# Altium PCB ToneControl 2.PcbDoc
Units mil, origin at the board's own origin, x right, y up, seen from the top; angles counter-clockwise.
Board outline 3700 x 2450 mil, 2 copper layers (Top Layer, Bottom Layer); 38 components, 33 nets, 92 pads, 0 vias.
Unrouted connection lines stored in the file: 59.
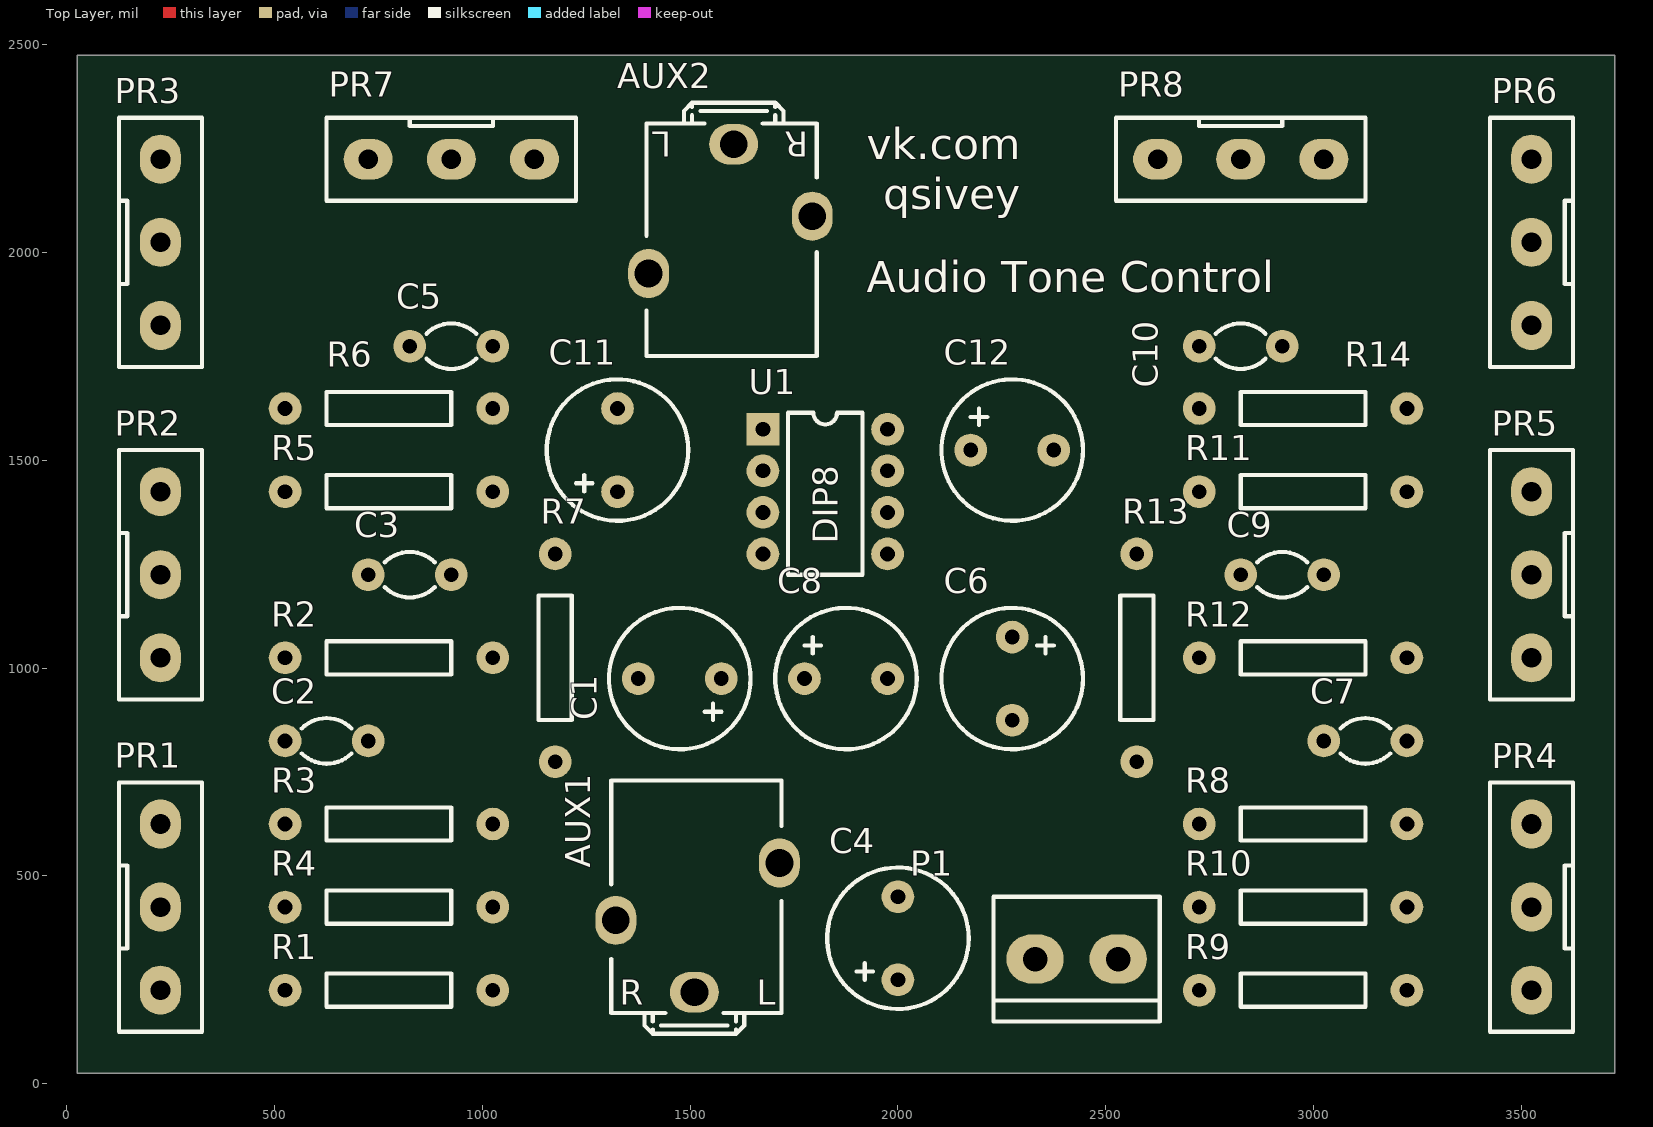
[diagram p0: Top Layer view]
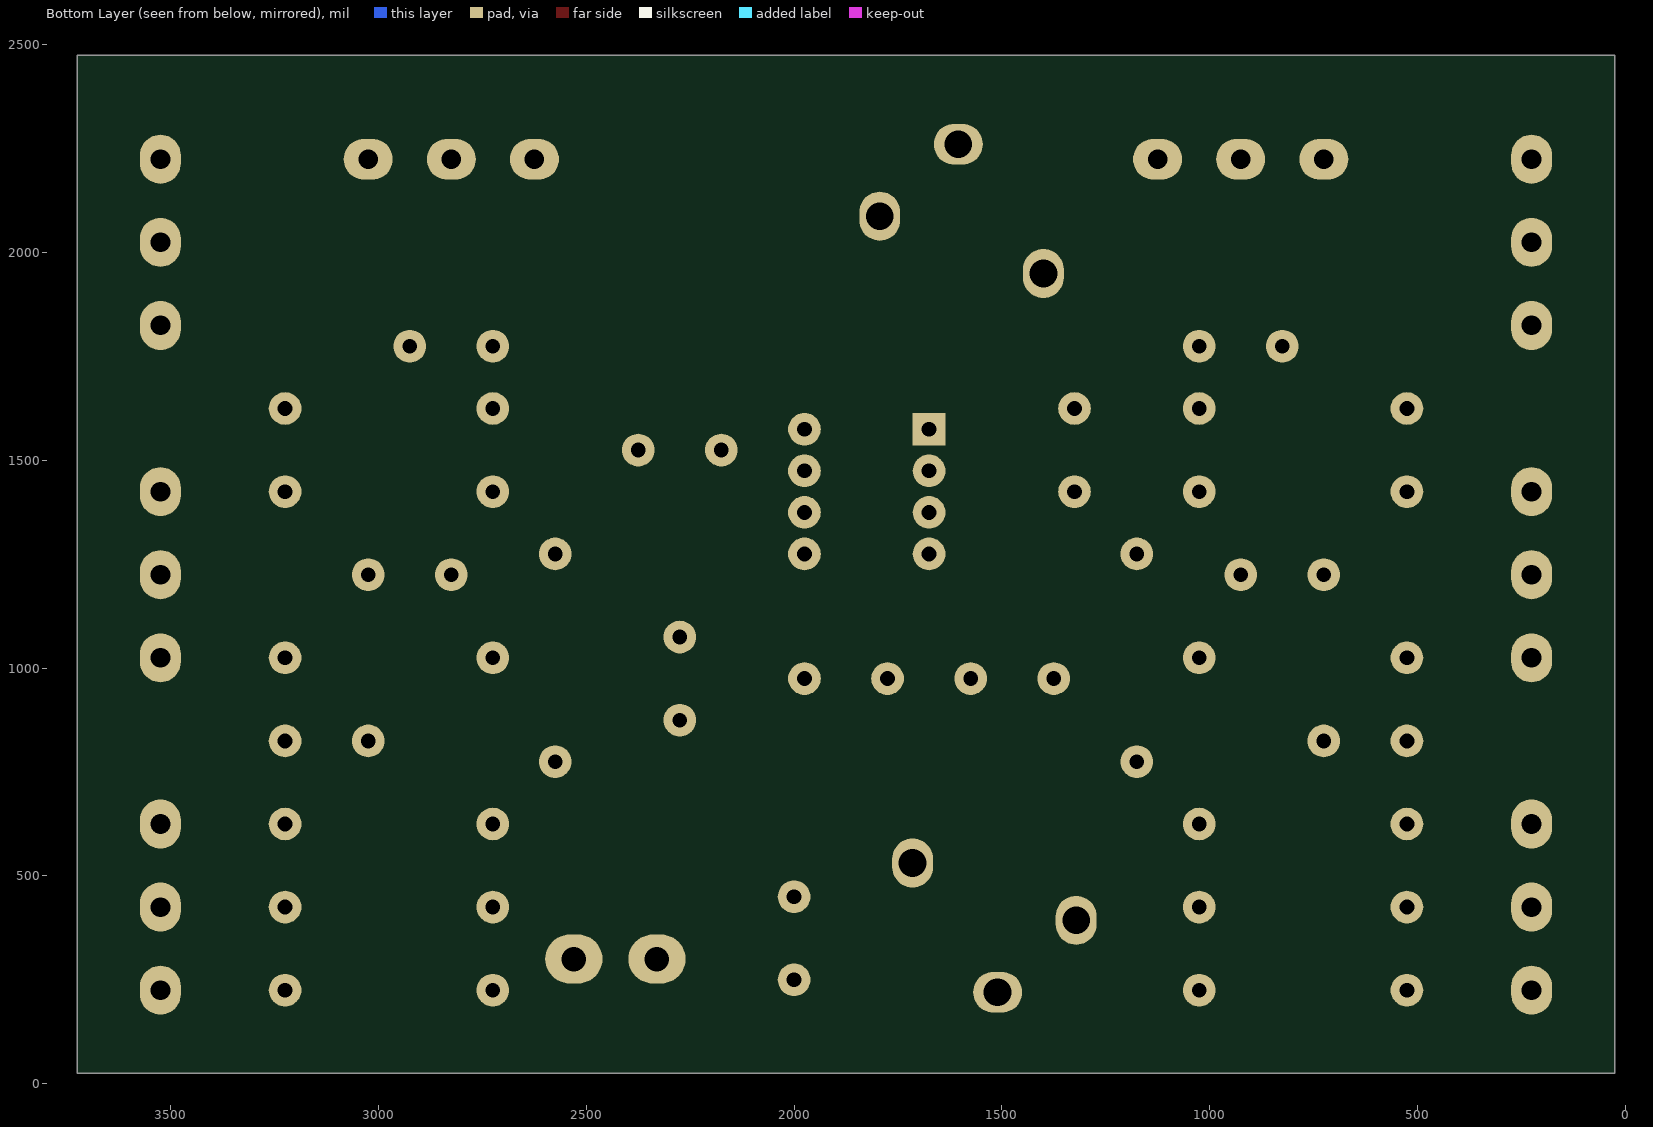
[diagram p1: Bottom Layer view, seen from below]

## Layer stack, top to bottom
Top Solder: solder mask 0.4, Solder Resist, Dk 3.5
Top Layer: signal copper 1.4
Dielectric 1: dielectric 12.6, FR-4, Dk 4.8
Bottom Layer: signal copper 1.4
Bottom Solder: solder mask 0.4, Solder Resist, Dk 3.5

## Board outline
25,25 25,2475 3725,2475 3725,25

## Design rules (kind name [scope] priority, off if disabled: settings)
BoardOutlineClearance [All] p1: gap=75 ignorepadtopadclearanceinfootprint=FALSE
Clearance [All] p1: gap=10 ignorepadtopadclearanceinfootprint=FALSE
PolygonConnect [All] p1: connectstyle=Relief reliefconductorwidth=10 reliefentries=4 polygonreliefangle="90 Angle" airgapwidth=10
RoutingVias [All] p1: holewidth=28 width=50 viastyle="Through Hole" minholewidth=28 minwidth=50 maxholewidth=28 maxwidth=50
SolderMaskExpansion [All] p1: expansion=4 istentingtop=FALSE
Width [All] p1: maxlimit=50 minlimit=20 preferedwidth=20
30 further rules are at their usual default settings.

## Components (designator, comment, footprint, x,y, rotation, side; value= is the part's Value field where it differs from the comment)
AUX1 "AUX" AUX_2 1510,220 r90 top
AUX2 "AUX" AUX_2 1604.72,2261.02 r270 top
C1 "10uF" CAP_POL_MED 1575,975 r180 top
C2 "47nF" CAP_CER_MED 725,825 r180 top
C3 "22nF" CAP_CER_MED 725,1225 r0 top
C4 "33uF" CAP_POL_MED 2000,250 r90 top
C5 "4.7nF" CAP_CER_MED 825,1775 r0 top
C6 "33uF" CAP_POL_MED 2275,1075 r270 top
C7 "47nF" CAP_CER_MED 3225,825 r180 top
C8 "10uF" CAP_POL_MED 1775,975 r0 top
C9 "22nF" CAP_CER_MED 3025,1225 r180 top
C10 "4.7nF" CAP_CER_MED 2925,1775 r180 top
C11 "10uF" CAP_POL_MED 1325,1425 r90 top
C12 "10uF" CAP_POL_MED 2175,1525 r0 top
P1 "Header_2" HEADER2 2330,300 r90 top
PR1 "100K" REOSTAT_CUS 225,625 r270 top
PR2 "100K" REOSTAT_CUS 225,1425 r270 top
PR3 "500K" REOSTAT_CUS 225,2225 r270 top
PR4 "100K" REOSTAT_CUS 3525,225 r90 top
PR5 "100K" REOSTAT_CUS 3525,1025 r90 top
PR6 "500K" REOSTAT_CUS 3525,1825 r90 top
PR7 "10K" REOSTAT_CUS 1125,2225 r180 top
PR8 "10K" REOSTAT_CUS 3025,2225 r180 top
R1 "12K" RES_MED 1025,225 r180 top
R2 "3.9K" RES_MED 1025,1025 r180 top
R3 "12K" RES_MED 525,625 r0 top
R4 "12K" RES_MED 525,425 r0 top
R5 "3.9K" RES_MED 525,1425 r0 top
R6 "1.8K" RES_MED 1025,1625 r180 top
R7 "1.8K" RES_MED 1175,1275 r270 top
R8 "12K" RES_MED 2725,625 r0 top
R9 "12K" RES_MED 3225,225 r180 top
R10 "12K" RES_MED 3225,425 r180 top
R11 "3.9K" RES_MED 2725,1425 r0 top
R12 "3.9K" RES_MED 3225,1025 r180 top
R13 "1.8K" RES_MED 2575,775 r90 top
R14 "1.8K" RES_MED 3225,1625 r180 top
U1 "TL-082" DIP8 1675,1575 r0 top

## Footprints (in the part's own frame and the unit in brackets; to place one, negate y for a bottom-side part, rotate by r counter-clockwise, add the part's x,y. Pads: shape width x height; smd on the part's side, far side on the other; paste and mask are expansions set on the pad)
AUX_2 [mm]
  oval 2.5x3 hole 1.7: 1(0,0)
  oval 3x2.5 hole 1.7: 2(4.4,4.8) 3(7.9,-5.2)
  silkscreen extent -2.54,-5.33 12.95,5.08, body extent -2.77,-5.59 13.21,5.33, height 4.57
CAP_CER_MED [mm]
  round 2 hole 0.9: 1(0,0) 2(5.08,0)
  silkscreen extent 1.02,-1.39 4.06,1.39, body extent -0.51,-0.51 5.59,0.51, height 7.37
CAP_POL_MED [mm]
  round 2 hole 0.9: 1(0,0) 2(5.08,0)
  silkscreen extent -1.79,-4.32 6.86,4.32, body extent -1.52,-4.06 6.67,4.06, height 13.61
DIP8 [mm]
  rect 2x2 hole 0.9: 1(0,0)
  round 2 hole 0.9: 2(0,-2.54) 3(0,-5.08) 4(0,-7.62) 5(7.62,-7.62) 6(7.62,-5.08) 7(7.62,-2.54) 8(7.62,0)
  silkscreen extent 1.52,-8.89 6.1,1.02, body extent -0.13,-8.89 7.75,1.27, height 3.05
HEADER2 [mm]
  oval 3x3.5 hole 1.5: 1(0,0) 2(0,-5.08)
  silkscreen extent -3.81,-7.62 3.81,2.54, body extent -3.81,-8 4.06,2.67, height 10.02
REOSTAT_CUS [mm]
  oval 3x2.5 hole 1.2: 1(0,0) 2(5.08,0) 3(10.16,0)
  silkscreen extent -2.54,-2.54 12.7,2.54, body extent -2.54,-18.8 12.7,6.6, height 15.24
RES_MED [mm]
  round 2 hole 0.9: 1(0,0) 2(12.7,0)
  silkscreen extent 2.54,-1.02 10.16,1.02, body extent -0.25,-1.52 12.95,1.52, height 3.05

## Part data
C1 C4 C6 C8 C11 C12: library part Cap_Pol
C2 C3 C5 C7 C9 C10: library part Cap_Ceram
PR1 PR2 PR3 PR4 PR5 PR6 PR7 PR8: library part Reostat
R1 R2 R3 R4 R5 R6 R7 R8 R9 R10 R11 R12 R13 R14: library part Res
U1: library part OpAmp_8, Name=TL-082

## Nets (pads, with @x,y where several pads share a name; then routed paths per layer and width w, separated by ;. In a path a pad name is that pad's centre, name@x,y a point inside that pad or via, vN(x,y) a via of type N, cw(c..) or ccw(c..) an arc to the next point about the centre after c; other vN are vias at no path point)
+5V: C4.1 P1.1 U1.8
-5V: C6.2 P1.2 U1.4
GND: AUX1.1 AUX2.1 C4.2 C6.1 PR7.3 PR8.3 U1.3 U1.5
NetAUX1_2: AUX1.2 C1.1
NetAUX1_3: AUX1.3 C8.1
NetAUX2_2: AUX2.2 PR7.2
NetAUX2_3: AUX2.3 PR8.2
NetC1_2: C1.2 R1.1 R2.1 R6.1
NetC2_1: C2.1 PR1.3 R1.2
NetC2_2: C2.2 PR1.1 R3.1
NetC3_1: C3.1 PR2.2
NetC3_2: C3.2 C5.2 R4.2 U1.2
NetC5_1: C5.1 PR3.2
NetC7_1: C7.1 PR4.3 R8.2
NetC7_2: C7.2 PR4.1 R9.1
NetC8_2: C8.2 R8.1 R11.1 R13.1
NetC9_1: C9.1 PR5.2
NetC9_2: C9.2 C10.2 R10.2 U1.6
NetC10_1: C10.1 PR6.2
NetC11_1: C11.1 R3.2 R5.2 R7.2 U1.1
NetC11_2: C11.2 PR7.1
NetC12_1: C12.1 R9.2 R12.2 R14.2 U1.7
NetC12_2: C12.2 PR8.1
NetPR1_2: PR1.2 R4.1
NetPR2_1: PR2.1 R5.1
NetPR2_3: PR2.3 R2.2
NetPR3_1: PR3.1 R7.1
NetPR3_3: PR3.3 R6.2
NetPR4_2: PR4.2 R10.1
NetPR5_1: PR5.1 R12.1
NetPR5_3: PR5.3 R11.2
NetPR6_1: PR6.1 R14.1
NetPR6_3: PR6.3 R13.2

## Silkscreen, mask and mechanical layers (free items; w line width, h text height)
Top Overlay:
  text "vk.com" at 1925,2225 h75
  text "qsivey" at 1965,2105 h75
  text "Audio Tone Control" at 1925,1905 h75
Mechanical 1:
  lines w50: 25,25 25,2475 3725,2475 3725,2425 3725,25 25,25

## Text inside footprints (layer, text, board x,y; h text height)
AUX1: Top Overlay "L" at 1660,190 h60; Top Overlay "R" at 1330,190 h60
AUX2: Top Overlay "L" at 1454.72,2291.02 h60 r180; Top Overlay "R" at 1784.72,2291.02 h60 r180
U1: Top Overlay "DIP8" at 1855,1300 h60 r90